# EAGLE board 5v-oscillator (EAGLE 5.07)
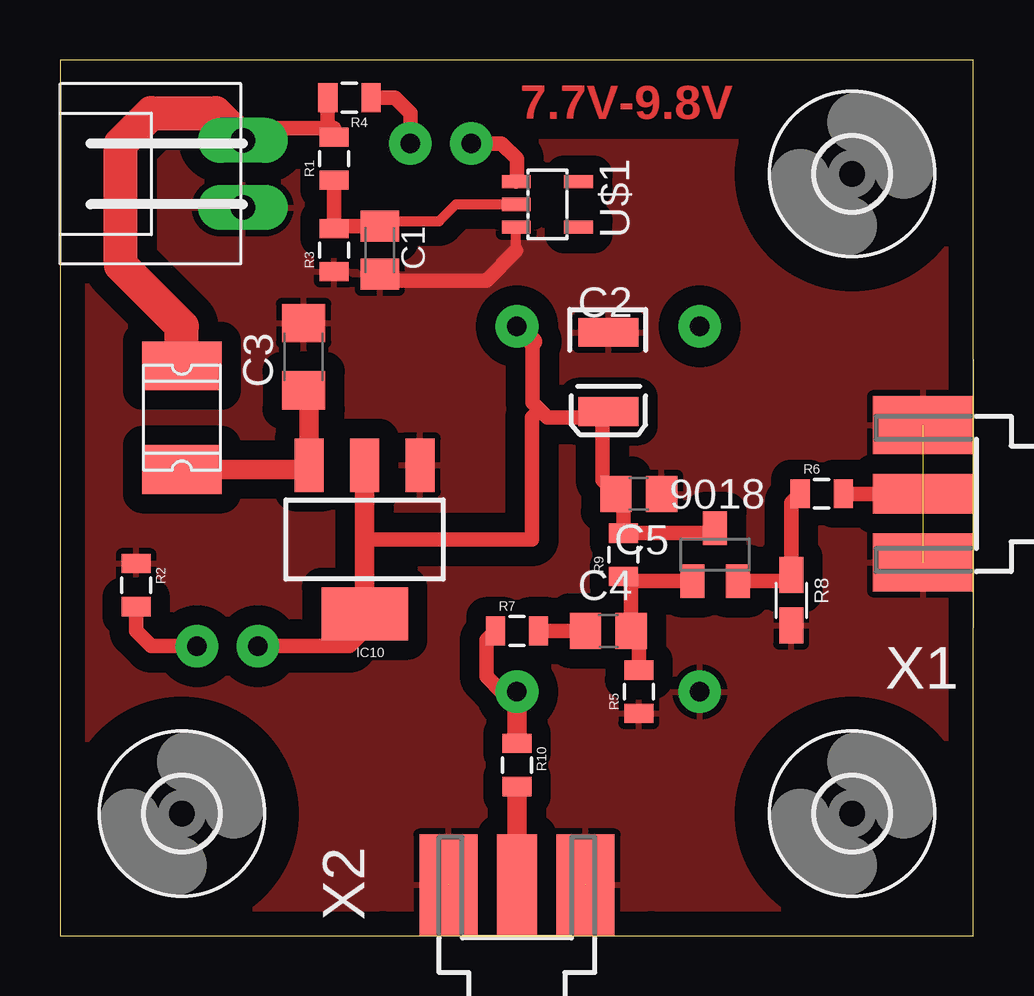
[diagram p0: board, top side]
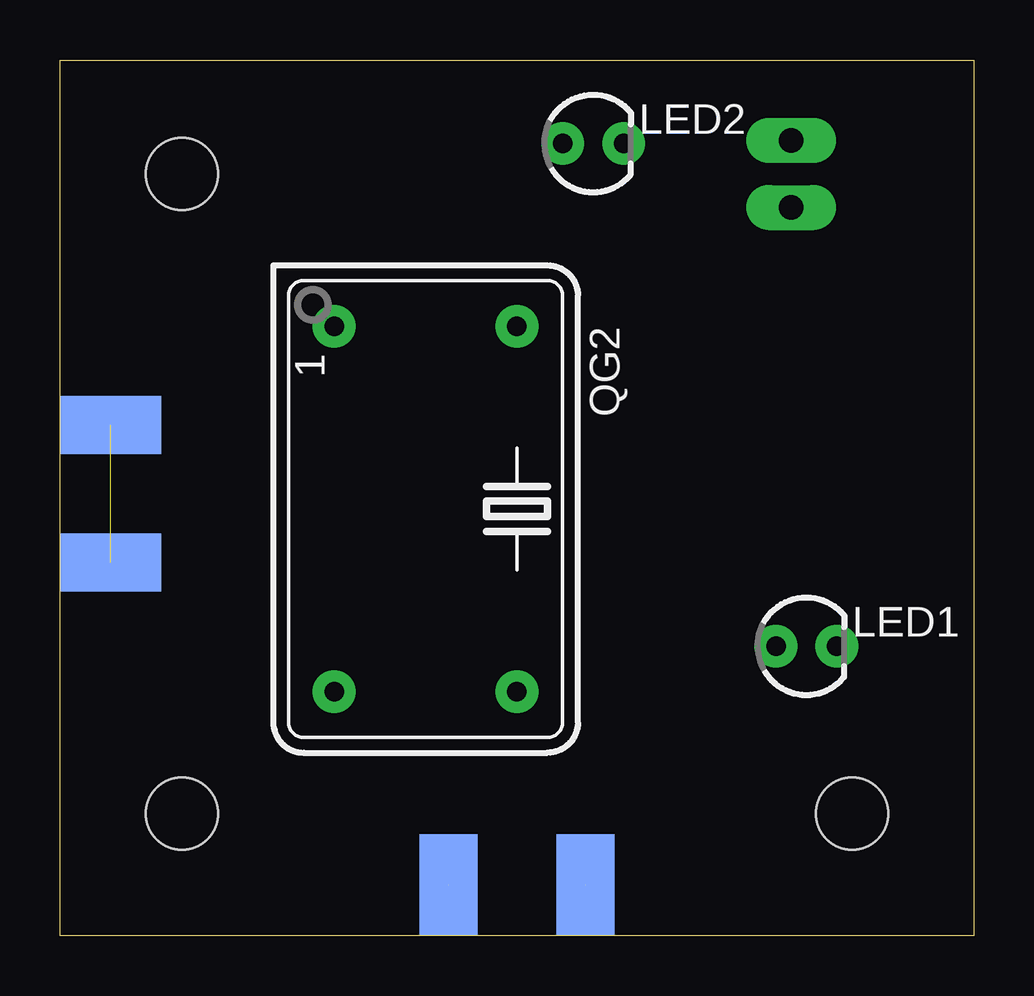
[diagram p1: board, bottom side, seen from below]

Size 38.1 x 36.5 mm. Coordinates in mm from the lower left corner, seen from the top.
Outline: 0,0 38.08,0 38.08,36.5 0,36.5 0,0
Copper layers (1*16): Top 0.035mm / dielectric 1.5mm / Bottom 0.035mm
Design rules "default": minimum track width 10mil, minimum drill 24mil, track to track 8mil, track to pad 8mil, pad to pad 8mil, via to via 8mil, smd to smd 8mil, copper to edge 40mil, drill to drill 8mil, minimum pad ring 10mil, minimum via ring 8mil, stop-mask expansion 4mil, vias tented up to drill 0mil, thermal gap 10mil

## Footprints (pad centres in the part's own frame; a part is rotated, then mirrored left to right if it is on the bottom)
SOT23-BEC = smd 1 x 1.4: B -0.95,-1.1; C 0,1.1; E 0.95,-1.1
C0805K = smd 1.3 x 1.6: 1 -1,0; 2 1,0
EIA3528 = smd 1.2 x 2.5: A 1.65,0; C -1.65,0
C1206 = smd 1.6 x 1.8: 1 -1.4,0; 2 1.4,0
C0805 = smd 1.3 x 1.5: 1 -0.95,0; 2 0.95,0
3,0 = hole 3: 0,0
SOT223 = smd 1.219 x 2.235: 1 -2.311,-3.099; 2 0,-3.099; 3 2.311,-3.099 | smd 3.6 x 2.2: 4 0,3.099
XH-1X2-LONG-LOCK = drill 1.016 pad 1.88 long: 1 1.397,0; 2 -1.397,0
LED3MM = drill 0.813 pad 1.778 round: A -1.27,0; K 1.27,0
1812L = smd 2.03 x 3.3: P$1 -2.16,0; P$2 2.16,0
DIL14S = drill 0.813 pad 1.778 round: 1 -7.62,-3.81; 7 7.62,-3.81; 8 7.62,3.81; 14 -7.62,3.81
0805 = smd 0.8 x 1.2: 1 -0.9,0; 2 0.9,0
R0805W = smd 1.5 x 1: 1 -1.052,0; 2 1.052,0
SOT23-5L = smd 0.55 x 1.2: 1 -0.95,-1.3; 2 0,-1.3; 3 0.95,-1.3; 4 0.95,1.3; 5 -0.95,1.3
SMA-KE = smd 4.191 x 1.651: 1 2.115,0 | smd 4.191 x 2.413: G@1 2.115,2.86; G@2 2.115,-2.86 | smd 4.191 x 2.413 bottom: G@3 2.115,2.86; G@4 2.115,-2.86

## Placement (x,y rotation side)
9018  [SOT23-BEC]  27.3,15.88 0 top
C1  104  [C0805K]  13.34,28.57 270 top
C2  10uf  [EIA3528]  22.86,23.5 270 top
C3  10u  [C1206]  10.16,24.13 90 top
C4  103  [C0805]  22.86,12.7 0 top
C5  103  [C0805]  24.13,18.41 180 top
H1  MOUNT-HOLE3.0  [3,0]  5.08,5.08 0 top
H2  MOUNT-HOLE3.0  [3,0]  33.02,5.08 0 top
H3  MOUNT-HOLE3.0  [3,0]  33.02,31.75 0 top
IC10  1117-5V  [SOT223]  12.7,16.51 180 top
JP7  EXT  [XH-1X2-LONG-LOCK]  7.62,31.75 90 top
LED1  GREEN  [LED3MM]  6.99,12.06 0 bottom
LED2  YELLOW  [LED3MM]  15.88,33.02 0 bottom
PTC  500mA  [1812L]  5.08,21.59 270 top
QG2  1M/50M  [DIL14S]  22.86,17.78 270 bottom
R1  56k/*68k  [0805]  11.43,32.38 90 top
R2  400R  [0805]  3.17,14.61 270 top
R3  200k  [0805]  11.43,28.57 90 top
R4  1k  [0805]  12.06,34.92 180 top
R5  22k  [0805]  24.13,10.16 90 top
R6  0/50  [0805]  31.75,18.41 0 top
R7  33  [0805]  19.05,12.7 0 top
R8  499  [R0805W]  30.48,13.97 270 top
R9  1k  [0805]  23.5,15.88 90 top
R10  33  [0805]  19.05,7.11 270 top
U$1  S-808XXCSOT23-5L  [SOT23-5L]  20.32,30.48 270 top
X1  SMA--KE  [SMA-KE]  38.1,18.41 180 top
X2  SMA--KE  [SMA-KE]  19.05,0 90 top

## Library data of the parts
9018 C1-C5 JP7 LED1 LED2 PTC QG2 R1-R10 U$1 = digital-toy
H1-H3 = holes
IC10 = SparkFun
X1 X2 = dtoy-RF

## Nets
CLK-REF: QG2.8 R7.1 R10.1
GND: C1.2 C2.C C3.2 C5.1 IC10.1 JP7.2 QG2.7 R2.1 R3.1 R5.1 R8.2 U$1.3 X1.G@1 X1.G@2 X1.G@3 X1.G@4 X2.G@1 X2.G@2 X2.G@3 X2.G@4
N$1: C1.1 R1.1 R3.2 U$1.2
N$2: C4.1 R7.2
N$3: LED2.K R4.1
N$4: R6.2 X1.1
N$5: LED2.A U$1.1
N$6: 9018.E R6.1 R8.1
N$7: 9018.B C4.2 R5.2 R9.1
N$14: C3.1 IC10.3 PTC.P$2
N$19: R10.2 X2.1
N$32: LED1.K R2.2
PWR_VIN: JP7.1 PTC.P$1 R1.2 R4.2
VCC: 9018.C C2.A C5.2 IC10.2 IC10.4 LED1.A QG2.14 R9.2

## Tracks (layer width: path | path; a pad name or v marks a point on that pad's centre or on a via)
CLK-REF
  Top 0.61: QG2.8 18.41,10.16 17.78,10.79 17.78,12.33 R7.1
  Top 0.813: R10.1 QG2.8
GND  (5 unrouted)
  Top 0.406: 19.02,28.55 U$1.3
  Top 0.61: C1.2 13.61,27.3 17.78,27.3 19.02,28.55
  pour Top (isolate 0.813): -5.08,44.45 34.29,44.45 48.26,30.48 48.26,1.27 44.45,-2.54 -6.35,-2.54 -7.62,-1.27 -7.62,41.91
N$1
  Top 0.406: C1.1 14.18,29.78 15.81,29.78 16.51,30.48 U$1.2
  Top 0.61: R1.1 R3.2 11.53,29.57 C1.1
N$2
  Top 0.61: R7.2 C4.1
N$3
  Top 0.61: R4.1 13.97,34.92 14.61,34.29 LED2.K
N$4
  Top 0.61: R6.2 X1.1
N$5
  Top 0.61: LED2.A 18.41,33.02 19.05,32.38 19.05,31.46 U$1.1
N$6
  Top 0.61: 9018.E 30.23,14.78 R8.1 30.48,18.05 R6.1
N$7
  Top 0.61: 9018.B 23.7,14.78 R9.1 23.81,14.66 C4.2 24.13,12.38 R5.2
N$14
  Top 0.61: 10.21,19.43 IC10.3 | 10.39,22.5 C3.1
  Top 0.813: PTC.P$2 10.21,19.43 | IC10.3 10.39,22.5
N$19
  Top 0.813: X2.1 R10.2
N$32
  Top 0.61: LED1.K 3.81,12.06 3.17,12.7 R2.2
PWR_VIN
  Top 0.61: 11.06,33.66 R1.2 11.43,33.66 | 11.06,33.66 8.89,33.66 8.38,33.15 | 11.06,33.66 11.16,33.66 R4.2
  Top 1.422: PTC.P$1 5.08,25.4 2.54,27.94 2.54,33.02 3.81,34.29 6.48,34.29 JP7.1 8.38,33.15
VCC
  Top 0.305: 12.7,12.7 IC10.4
  Top 0.61: 12.7,16.51 19.68,16.51 19.68,21.59 20,21.91 | 19.69,24.76 19.69,22.22 20,21.91 | 20,21.91 20.32,21.59 22.61,21.59 | 22.61,21.59 C2.A | 22.61,21.59 22.61,18.99 C5.2 23.5,18.1 R9.2 27.11,16.77 9018.C | LED1.A 12.06,12.06 12.7,12.7
  Top 0.813: 19.69,24.76 QG2.14 | IC10.4 12.7,16.51 IC10.2

## Text on the board
Top: 7.7V-9.8V